# EAGLE board TestNode V1-pan (EAGLE 6.4)
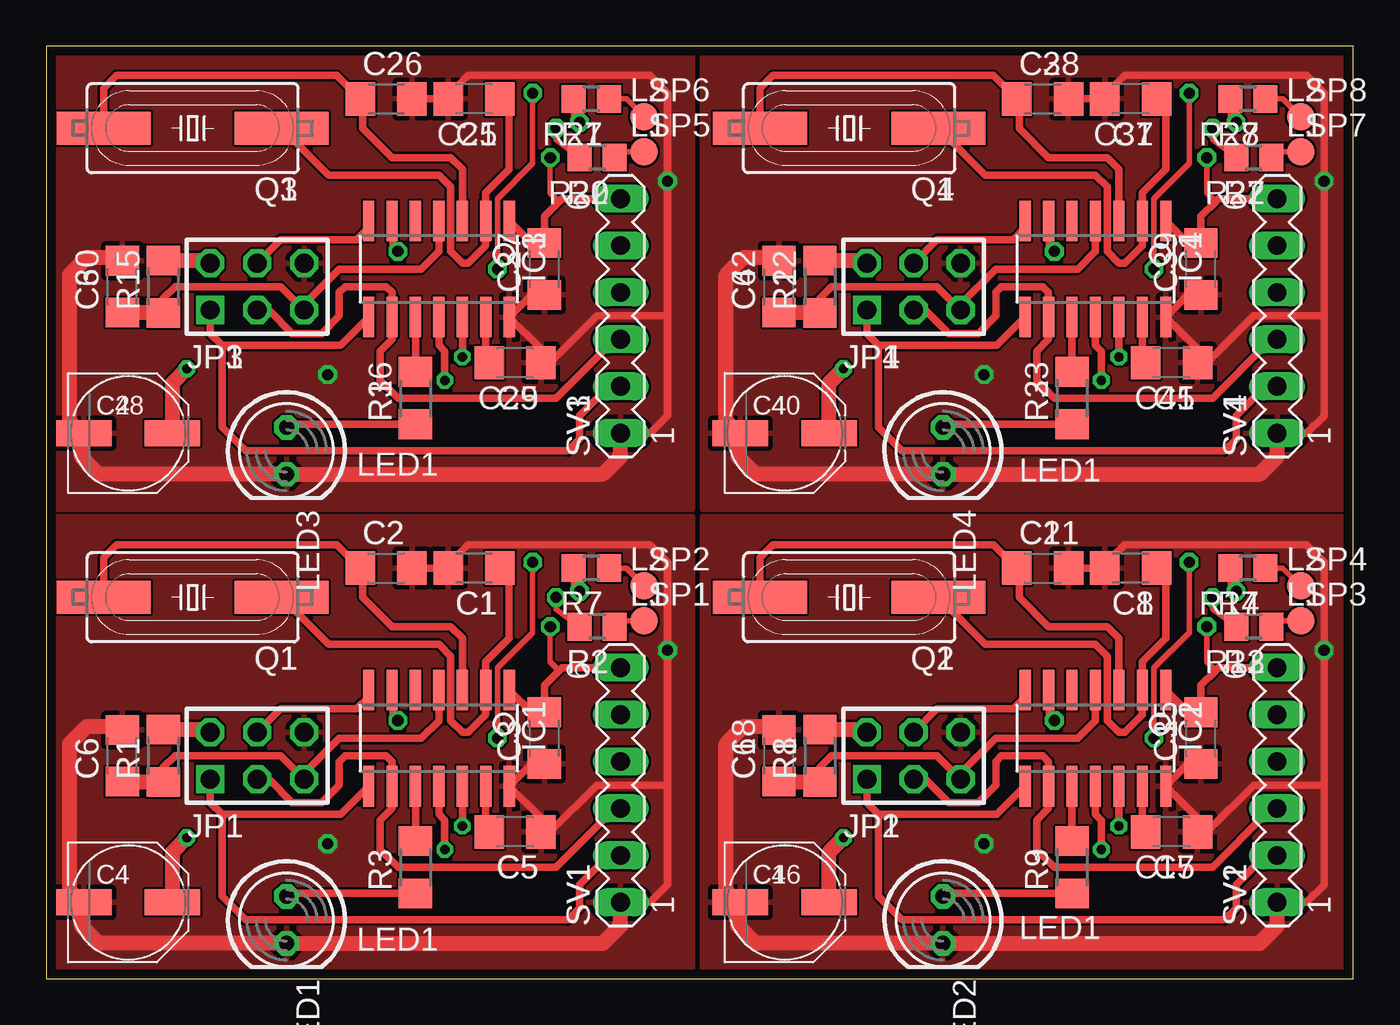
[diagram p0: board, top side]
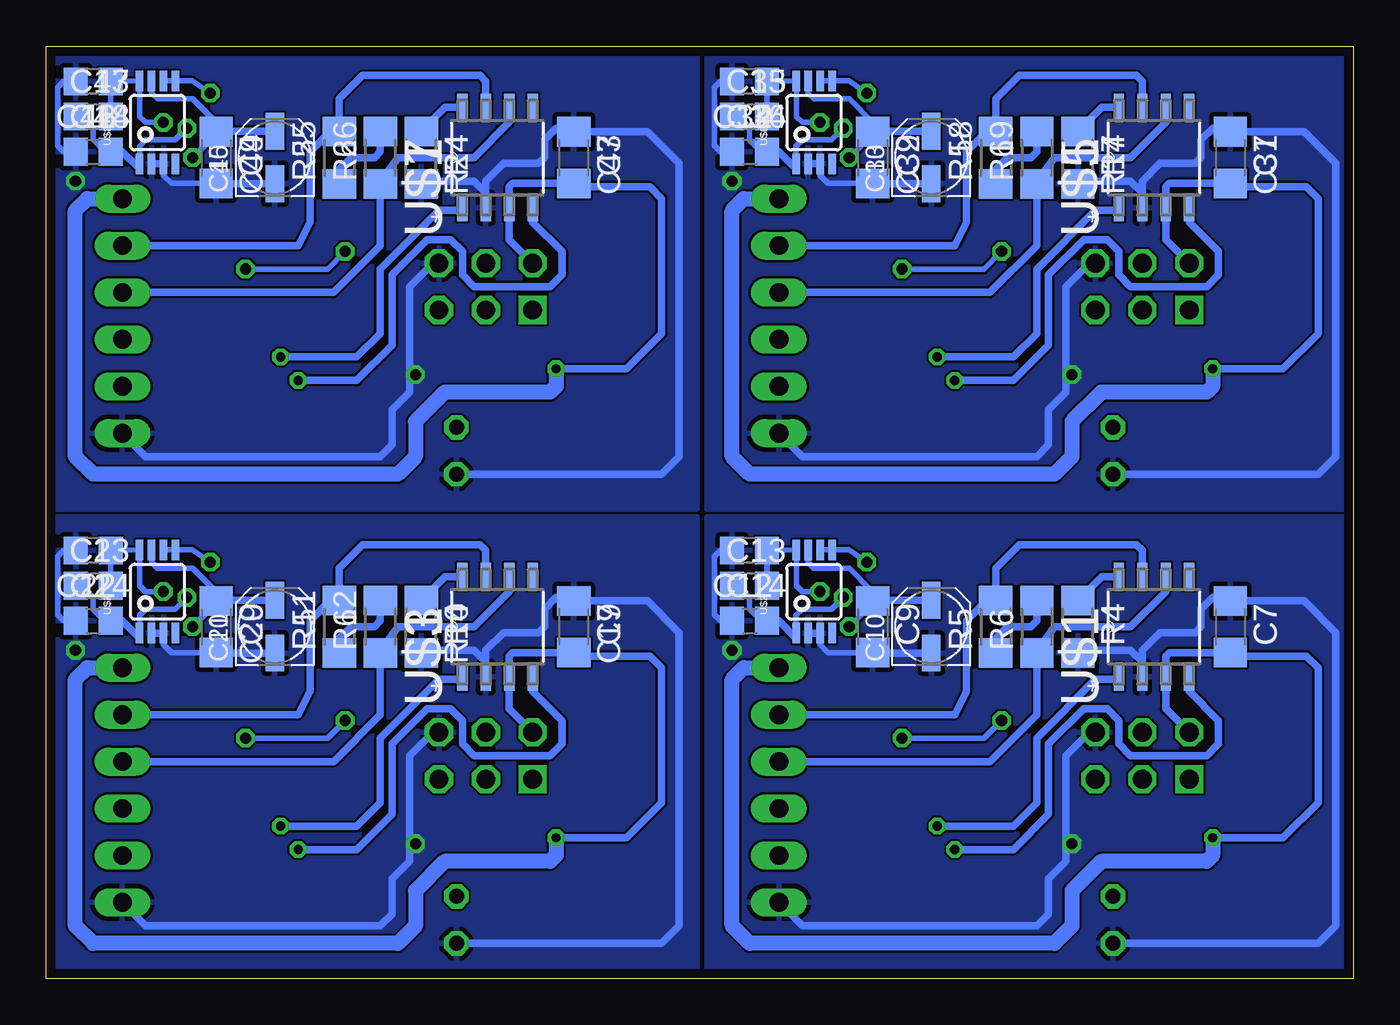
[diagram p1: board, bottom side, seen from below]

Size 70.8 x 50.48 mm. Coordinates in mm from the lower left corner, seen from the top.
Outline: 0,0 70.8,0 70.8,50.48 0,50.48 0,0
Copper layers (1*16): Top 0.035mm / dielectric 1.5mm / Bottom 0.035mm
Design rules "default *": minimum track width 10mil, minimum drill 15mil, track to track 5mil, track to pad 5mil, pad to pad 5mil, via to via 5mil, smd to smd 5mil, copper to edge 20mil, drill to drill 8mil, minimum pad ring 10mil, minimum via ring 8mil, stop-mask expansion 4mil, vias tented up to drill 0mil, thermal gap 10mil

## Footprints (pad centres in the part's own frame; a part is rotated, then mirrored left to right if it is on the bottom)
C1206 = smd 1.6 x 1.8: 1 -1.4,0; 2 1.4,0
PANASONIC_D = smd 3 x 1.4: + 2.4,0; - -2.4,0
UD-4X5,8_NICHICON = smd 2 x 1: + 1.425,0; - -1.425,0
C0805 = smd 1.3 x 1.5: 1 -0.95,0; 2 0.95,0
SOIC14 = smd 0.61 x 2.21: 1 -3.81,-2.603; 2 -2.54,-2.603; 3 -1.27,-2.603; 4 0,-2.603; 5 1.27,-2.603; 6 2.54,-2.603; 7 3.81,-2.603; 8 3.81,2.603; 9 2.54,2.603; 10 1.27,2.603; 11 0,2.603; 12 -1.27,2.603; 13 -2.54,2.603; 14 -3.81,2.603
AVR-ISP-6 = drill 1.016 square: 1 -2.54,-1.27 | drill 1.016 octagon: 2 -2.54,1.27; 3 0,-1.27; 4 0,1.27; 5 2.54,-1.27; 6 2.54,1.27
LED5MM = drill 0.813 octagon: A -1.27,0; K 1.27,0
TP15R = smd 1.5 x 1.5: TP 0,0
SM49 = smd 5.08 x 1.778: 1 -4.826,0; 2 4.826,0
R1206 = smd 1.6 x 1.803: 1 -1.422,0; 2 1.422,0
R0805 = smd 1.3 x 1.5: 1 -0.95,0; 2 0.95,0
MA06-1 = drill 1.016 long: 1 -6.35,0; 2 -3.81,0; 3 -1.27,0; 4 1.27,0; 5 3.81,0; 6 6.35,0
SOIC127P600X175-8N = smd 1.473 x 0.559: 1 -2.718,1.905; 2 -2.718,0.635; 3 -2.718,-0.635; 4 -2.718,-1.905; 5 2.718,-1.905; 6 2.718,-0.635; 7 2.718,0.635; 8 2.718,1.905
MSOP8 = smd 0.4 x 1.1: 1 -0.975,-2.25; 2 -0.325,-2.25; 3 0.325,-2.25; 4 0.975,-2.25; 5 0.975,2.25; 6 0.325,2.25; 7 -0.325,2.25; 8 -0.975,2.25

## Placement (x,y rotation side)
C1  22pF  [C1206]  23.18,22.23 180 top
C2  22pF  [C1206]  18.41,22.23 0 top
C3  100nF  [C1206]  26.99,13.02 90 top
C4  100uF  [PANASONIC_D]  4.45,4.13 0 top
C5  100nF  [C1206]  25.4,7.94 180 top
C6  22pF  [C1206]  4.13,12.06 90 top
C7  100nF  [C1206]  6.67,19.05 270 bottom
C8  22pF  [C1206]  58.74,22.23 180 top
C9  100nF  [C1206]  26.04,19.05 270 bottom
C10  10uF  [UD-4X5,8_NICHICON]  22.86,19.05 90 bottom
C11  22pF  [C1206]  53.98,22.23 0 top
C12  100nF  [C0805]  32.7,23.18 180 bottom
C13  100nF  [C0805]  32.7,21.27 0 bottom
C14  100nF  [C0805]  32.7,19.37 0 bottom
C15  100nF  [C1206]  62.55,13.02 90 top
C16  100uF  [PANASONIC_D]  40.01,4.13 0 top
C17  100nF  [C1206]  60.96,7.94 180 top
C18  22pF  [C1206]  39.69,12.06 90 top
C19  100nF  [C1206]  42.23,19.05 270 bottom
C20  100nF  [C1206]  61.59,19.05 270 bottom
C21  10uF  [UD-4X5,8_NICHICON]  58.42,19.05 90 bottom
C22  100nF  [C0805]  68.26,23.18 180 bottom
C23  100nF  [C0805]  68.26,21.27 0 bottom
C24  100nF  [C0805]  68.26,19.37 0 bottom
C25  22pF  [C1206]  23.18,47.62 180 top
C26  22pF  [C1206]  18.41,47.62 0 top
C27  100nF  [C1206]  26.99,38.42 90 top
C28  100uF  [PANASONIC_D]  4.45,29.53 0 top
C29  100nF  [C1206]  25.4,33.34 180 top
C30  22pF  [C1206]  4.13,37.47 90 top
C31  100nF  [C1206]  6.67,44.45 270 bottom
C32  100nF  [C1206]  26.04,44.45 270 bottom
C33  10uF  [UD-4X5,8_NICHICON]  22.86,44.45 90 bottom
C34  100nF  [C0805]  32.7,48.58 180 bottom
C35  100nF  [C0805]  32.7,46.67 0 bottom
C36  100nF  [C0805]  32.7,44.77 0 bottom
C37  22pF  [C1206]  58.74,47.62 180 top
C38  22pF  [C1206]  53.98,47.62 0 top
C39  100nF  [C1206]  62.55,38.42 90 top
C40  100uF  [PANASONIC_D]  40.01,29.53 0 top
C41  100nF  [C1206]  60.96,33.34 180 top
C42  22pF  [C1206]  39.69,37.47 90 top
C43  100nF  [C1206]  42.23,44.45 270 bottom
C44  100nF  [C1206]  61.59,44.45 270 bottom
C45  10uF  [UD-4X5,8_NICHICON]  58.42,44.45 90 bottom
C46  100nF  [C0805]  68.26,48.58 180 bottom
C47  100nF  [C0805]  68.26,46.67 0 bottom
C48  100nF  [C0805]  68.26,44.77 0 bottom
IC1  TINY24/44/84-SSU  [SOIC14]  21.27,13.02 180 top
IC2  TINY24/44/84-SSU  [SOIC14]  56.83,13.02 180 top
IC3  TINY24/44/84-SSU  [SOIC14]  21.27,38.42 180 top
IC4  TINY24/44/84-SSU  [SOIC14]  56.83,38.42 180 top
JP1  AVR-ISP-6VERT  [AVR-ISP-6]  11.43,12.06 0 top
JP2  AVR-ISP-6VERT  [AVR-ISP-6]  46.99,12.06 0 top
JP3  AVR-ISP-6VERT  [AVR-ISP-6]  11.43,37.47 0 top
JP4  AVR-ISP-6VERT  [AVR-ISP-6]  46.99,37.47 0 top
LED1  [LED5MM]  13.02,3.17 270 top
LED2  [LED5MM]  48.58,3.17 270 top
LED3  [LED5MM]  13.02,28.57 270 top
LED4  [LED5MM]  48.58,28.57 270 top
LSP1  TPTP15R  [TP15R]  32.38,19.37 0 top
LSP2  TPTP15R  [TP15R]  32.38,21.27 0 top
LSP3  TPTP15R  [TP15R]  67.94,19.37 0 top
LSP4  TPTP15R  [TP15R]  67.94,21.27 0 top
LSP5  TPTP15R  [TP15R]  32.38,44.77 0 top
LSP6  TPTP15R  [TP15R]  32.38,46.67 0 top
LSP7  TPTP15R  [TP15R]  67.94,44.77 0 top
LSP8  TPTP15R  [TP15R]  67.94,46.67 0 top
Q1  16Mhz  [SM49]  7.94,20.64 180 top
Q2  16Mhz  [SM49]  43.5,20.64 180 top
Q3  16Mhz  [SM49]  7.94,46.04 180 top
Q4  16Mhz  [SM49]  43.5,46.04 180 top
R1  10k  [R1206]  6.35,12.06 90 top
R2  1k  [R0805]  29.84,19.05 180 top
R3  470  [R1206]  20,6.03 90 top
R4  10k  [R1206]  14.92,19.05 270 bottom
R5  120  [R1206]  19.37,19.05 90 bottom
R6  0  [R1206]  17.14,19.05 90 bottom
R7  1k  [R0805]  29.53,22.23 180 top
R8  10k  [R1206]  41.91,12.06 90 top
R9  470  [R1206]  55.56,6.03 90 top
R10  10k  [R1206]  50.48,19.05 270 bottom
R11  120  [R1206]  54.93,19.05 90 bottom
R12  0  [R1206]  52.7,19.05 90 bottom
R13  1k  [R0805]  65.41,19.05 180 top
R14  1k  [R0805]  65.09,22.23 180 top
R15  10k  [R1206]  6.35,37.47 90 top
R16  470  [R1206]  20,31.43 90 top
R17  10k  [R1206]  14.92,44.45 270 bottom
R18  120  [R1206]  19.37,44.45 90 bottom
R19  0  [R1206]  17.14,44.45 90 bottom
R20  1k  [R0805]  29.84,44.45 180 top
R21  1k  [R0805]  29.53,47.62 180 top
R22  10k  [R1206]  41.91,37.47 90 top
R23  470  [R1206]  55.56,31.43 90 top
R24  10k  [R1206]  50.48,44.45 270 bottom
R25  120  [R1206]  54.93,44.45 90 bottom
R26  0  [R1206]  52.7,44.45 90 bottom
R27  1k  [R0805]  65.41,44.45 180 top
R28  1k  [R0805]  65.09,47.62 180 top
SV1  [MA06-1]  31.11,10.48 90 top
SV2  [MA06-1]  66.67,10.48 90 top
SV3  [MA06-1]  31.11,35.88 90 top
SV4  [MA06-1]  66.67,35.88 90 top
U$1  MCP2551-I/SN  [SOIC127P600X175-8N]  10.79,19.05 90 bottom
U$2  AD849X  [MSOP8]  29.21,20.95 0 bottom
U$3  MCP2551-I/SN  [SOIC127P600X175-8N]  46.35,19.05 90 bottom
U$4  AD849X  [MSOP8]  64.77,20.95 0 bottom
U$5  MCP2551-I/SN  [SOIC127P600X175-8N]  10.79,44.45 90 bottom
U$6  AD849X  [MSOP8]  29.21,46.35 0 bottom
U$7  MCP2551-I/SN  [SOIC127P600X175-8N]  46.35,44.45 90 bottom
U$8  AD849X  [MSOP8]  64.77,46.35 0 bottom

## Library data of the parts
C1-C3 C5-C15 C17-C27 C29-C39 C41-C48 R1-R28 = rcl
C4 C16 C28 C40 = rcl; FARNELL: 107SML016M
IC1-IC4 JP1-JP4 = avr-7
LED1-LED4 = led
LSP1-LSP8 = testpad
Q1-Q4 = crystal; OC_FARNELL: unknown; OC_NEWARK: unknown
SV1-SV4 = con-lstb; OC_FARNELL: unknown; OC_NEWARK: unknown
U$1 U$3 U$5 U$7 = mcp; MPN: MCP2551-I/SN; OC_FARNELL: 9758569; OC_NEWARK: 69K7604; PACKAGE: SOIC-8; SUPPLIER: Microchip
U$2 U$4 U$6 U$8 = ad849x

## Nets
ADC1: IC2.10 R9.2
ADC2: IC2.6 U$4.5 U$4.6
ADC3: IC1.10 R3.2
ADC4: IC3.10 R16.2
ADC5: IC3.6 U$6.5 U$6.6
ADC6: IC4.10 R23.2
ADC7: IC1.6 U$2.5 U$2.6
ADC8: IC4.6 U$8.5 U$8.6
GND: C1.2 C2.2 C3.1 C4.- C5.1 C6.2 C7.1 C9.2 C10.- C12.2 C14.1 IC1.14 JP1.6 LED1.K R4.2 SV1.1 U$1.2 U$2.2 U$2.3
GND1: C8.2 C11.2 C15.1 C16.- C17.1 C18.2 C19.1 C20.2 C21.- C22.2 C24.1 IC2.14 JP2.6 LED2.K R10.2 SV2.1 U$3.2 U$4.2 U$4.3
GND2: C25.2 C26.2 C27.1 C28.- C29.1 C30.2 C31.1 C32.2 C33.- C34.2 C36.1 IC3.14 JP3.6 LED3.K R17.2 SV3.1 U$5.2 U$6.2 U$6.3
GND3: C37.2 C38.2 C39.1 C40.- C41.1 C42.2 C43.1 C44.2 C45.- C46.2 C48.1 IC4.14 JP4.6 LED4.K R24.2 SV4.1 U$7.2 U$8.2 U$8.3
MISO: IC1.8 JP1.1 SV1.2
MISO1: IC2.8 JP2.1 SV2.2
MISO2: IC3.8 JP3.1 SV3.2
MISO3: IC4.8 JP4.1 SV4.2
MOSI: IC1.7 JP1.4
MOSI1: IC2.7 JP2.4
MOSI2: IC3.7 JP3.4
MOSI3: IC4.7 JP4.4
N$1: C1.1 IC1.2 Q1.1
N$2: C2.1 IC1.3 Q1.2
N$3: C12.1 C13.2 R7.2 U$2.8
N$4: C5.2 IC1.13
N$5: R4.1 U$1.8
N$6: LED1.A R3.1
N$7: R5.1 R6.2
N$8: C13.1 C14.2 R2.2 U$2.1
N$9: C8.1 IC2.2 Q2.1
N$10: LSP1.TP R2.1
N$11: LSP2.TP R7.1
N$12: C11.1 IC2.3 Q2.2
N$13: C17.2 IC2.13
N$14: LED2.A R9.1
N$15: R10.1 U$3.8
N$16: R11.1 R12.2
N$17: C22.1 C23.2 R14.2 U$4.8
N$18: C23.1 C24.2 R13.2 U$4.1
N$19: LSP3.TP R13.1
N$20: LSP4.TP R14.1
N$21: C25.1 IC3.2 Q3.1
N$22: C26.1 IC3.3 Q3.2
N$23: C29.2 IC3.13
N$24: LED3.A R16.1
N$25: R17.1 U$5.8
N$26: R18.1 R19.2
N$27: C34.1 C35.2 R21.2 U$6.8
N$28: C35.1 C36.2 R20.2 U$6.1
N$29: LSP5.TP R20.1
N$30: LSP6.TP R21.1
N$31: C37.1 IC4.2 Q4.1
N$32: C38.1 IC4.3 Q4.2
N$33: C41.2 IC4.13
N$34: LED4.A R23.1
N$35: R24.1 U$7.8
N$36: R25.1 R26.2
N$37: C46.1 C47.2 R28.2 U$8.8
N$38: C47.1 C48.2 R27.2 U$8.1
N$39: LSP7.TP R27.1
N$40: LSP8.TP R28.1
RST: C6.1 IC1.4 JP1.5 R1.1
RST1: C18.1 IC2.4 JP2.5 R8.1
RST2: C30.1 IC3.4 JP3.5 R15.1
RST3: C42.1 IC4.4 JP4.5 R22.1
RX0: IC1.11 U$1.4
RX1: IC2.11 U$3.4
RX2: IC3.11 U$5.4
RX3: IC4.11 U$7.4
SCK: IC1.9 JP1.3 SV1.3
SCK1: IC2.9 JP2.3 SV2.3
SCK2: IC3.9 JP3.3 SV3.3
SCK3: IC4.9 JP4.3 SV4.3
TX0: IC1.12 U$1.1
TX1: IC2.12 U$3.1
TX2: IC3.12 U$5.1
TX3: IC4.12 U$7.1
UART0+: R5.2 SV1.5 U$1.7
UART0+1: R11.2 SV2.5 U$3.7
UART0+2: R18.2 SV3.5 U$5.7
UART0+3: R25.2 SV4.5 U$7.7
UART0-: R6.1 SV1.4 U$1.6
UART0-1: R12.1 SV2.4 U$3.6
UART0-2: R19.1 SV3.4 U$5.6
UART0-3: R26.1 SV4.4 U$7.6
VCC: C3.2 C4.+ C7.2 C9.1 C10.+ IC1.1 JP1.2 R1.2 SV1.6 U$1.3 U$2.7
VCC1: C15.2 C16.+ C19.2 C20.1 C21.+ IC2.1 JP2.2 R8.2 SV2.6 U$3.3 U$4.7
VCC2: C27.2 C28.+ C31.2 C32.1 C33.+ IC3.1 JP3.2 R15.2 SV3.6 U$5.3 U$6.7
VCC3: C39.2 C40.+ C43.2 C44.1 C45.+ IC4.1 JP4.2 R22.2 SV4.6 U$7.3 U$8.7

## Tracks (layer width: path | path; a pad name or v marks a point on that pad's centre or on a via)
ADC1
  Top 0.406: IC2.10 R9.2
ADC2  (via drill 0.6)
  Top 0.305: v61.91,22.54 61.91,18.73 60.01,16.83 v60.01,13.02 | v54.61,13.97 54.29,14.29 IC2.6
  Bottom 0.305: U$4.6 U$4.5 62.89,23.2 v61.91,22.54 | v60.01,13.02 55.56,13.02 v54.61,13.97
ADC3
  Top 0.406: IC1.10 R3.2
ADC4
  Top 0.406: IC3.10 R16.2
ADC5  (via drill 0.6)
  Top 0.305: v26.35,47.94 26.35,44.13 24.45,42.23 v24.45,38.42 | v19.05,39.37 18.73,39.69 IC3.6
  Bottom 0.305: U$6.6 U$6.5 27.33,48.6 v26.35,47.94 | v24.45,38.42 20,38.42 v19.05,39.37
ADC6
  Top 0.406: IC4.10 R23.2
ADC7  (via drill 0.6)
  Top 0.305: v26.35,22.54 26.35,18.73 24.45,16.83 v24.45,13.02 | v19.05,13.97 18.73,14.29 IC1.6
  Bottom 0.305: U$2.6 U$2.5 27.33,23.2 v26.35,22.54 | v24.45,13.02 20,13.02 v19.05,13.97
ADC8  (via drill 0.6)
  Top 0.305: v61.91,47.94 61.91,44.13 60.01,42.23 v60.01,38.42 | v54.61,39.37 54.29,39.69 IC4.6
  Bottom 0.305: U$8.6 U$8.5 62.89,48.6 v61.91,47.94 | v60.01,38.42 55.56,38.42 v54.61,39.37
GND  (via drill 0.6 pad 1.02)
  Top 0.406: C3.1 26.29,11.62 IC1.14 26.8,8.7 C5.1 27.3,7.94 29.84,10.48 33.66,10.48 | SV1.1 32.7,4.13 33.66,5.08 33.66,10.48 | C1.2 C2.2 22.23,22.23 22.23,22.86 22.86,23.5 32.7,23.5 33.66,22.54 v33.66,17.78 33.66,10.48
  Top 0.813: SV1.1 31.11,2.86 30.16,1.91 LED1.K 2.86,1.91 1.91,2.86 1.91,3.99 C4.- 1.91,4.13 1.27,4.76 1.27,12.7 2.22,13.65 3.94,13.65 C6.2
  Bottom 0.305: C9.2 28.45,17.65 28.89,18.1 U$2.3 | C14.1 34.29,19.37 34.61,19.68 34.61,22.86 34.29,23.18 C12.2
  Bottom 0.406: JP1.6 14.29,13.34 15.56,12.06 15.56,6.35 16.51,5.4 16.51,3.49 17.14,2.86 29.84,2.86 SV1.1 | LED1.K 1.91,1.91 0.95,2.86 0.95,18.73 2.67,20.45 C7.1 6.86,20.64 7.62,20.64 8.26,20 8.26,19.05 8.57,18.73 10.48,18.73 11.43,17.78 U$1.2 11.43,17.14 12.06,17.78 14.77,17.78 R4.2 | C10.- 26.04,17.62 C9.2 | U$2.3 U$2.2
  other vias: 15.24,7.3
  pour Bottom: 0,25 35,25 35,0 0,0
  pour Top: 0,25 35,25 35,0 0,0
GND1  (via drill 0.6 pad 1.02)
  Top 0.406: C15.1 61.85,11.62 IC2.14 62.36,8.7 C17.1 62.87,7.94 65.41,10.48 69.22,10.48 | SV2.1 68.26,4.13 69.22,5.08 69.22,10.48 | C8.2 C11.2 57.78,22.23 57.78,22.86 58.42,23.5 68.26,23.5 69.22,22.54 v69.22,17.78 69.22,10.48
  Top 0.813: SV2.1 66.67,2.86 65.72,1.91 LED2.K 38.42,1.91 37.47,2.86 37.47,3.99 C16.- 37.47,4.13 36.83,4.76 36.83,12.7 37.78,13.65 39.5,13.65 C18.2
  Bottom 0.305: C20.2 64,17.65 64.45,18.1 64.45,18.7 U$4.3 | C24.1 69.85,19.37 70.17,19.68 70.17,22.86 69.85,23.18 C22.2
  Bottom 0.406: JP2.6 49.85,13.34 51.12,12.06 51.12,6.35 52.07,5.4 52.07,3.49 52.7,2.86 65.41,2.86 SV2.1 | LED2.K 37.47,1.91 36.51,2.86 36.51,18.73 38.23,20.45 C19.1 42.41,20.64 43.18,20.64 43.81,20 43.81,19.05 44.13,18.73 46.04,18.73 46.99,17.78 U$3.2 46.99,17.14 47.62,17.78 50.33,17.78 R10.2 | C21.- 61.59,17.62 C20.2 | U$4.3 U$4.2
  other vias: 50.8,7.3
  pour Bottom: 35.56,25 70.56,25 70.56,0 35.56,0
  pour Top: 35.56,25 70.56,25 70.56,0 35.56,0
GND2  (via drill 0.6 pad 1.02)
  Top 0.406: C27.1 26.29,37.02 IC3.14 26.8,34.1 C29.1 27.3,33.34 29.84,35.88 33.66,35.88 | SV3.1 32.7,29.53 33.66,30.48 33.66,35.88 | C25.2 C26.2 22.23,47.62 22.23,48.26 22.86,48.9 32.7,48.9 33.66,47.94 v33.66,43.18 33.66,35.88
  Top 0.813: SV3.1 31.11,28.26 30.16,27.3 LED3.K 2.86,27.3 1.91,28.26 1.91,29.39 C28.- 1.91,29.53 1.27,30.16 1.27,38.1 2.22,39.05 3.94,39.05 C30.2
  Bottom 0.305: C32.2 28.45,43.05 28.89,43.5 U$6.3 | C36.1 34.29,44.77 34.61,45.09 34.61,48.26 34.29,48.58 C34.2
  Bottom 0.406: JP3.6 14.29,38.73 15.56,37.47 15.56,31.75 16.51,30.8 16.51,28.89 17.14,28.26 29.84,28.26 SV3.1 | LED3.K 1.91,27.3 0.95,28.26 0.95,44.13 2.67,45.85 C31.1 6.86,46.04 7.62,46.04 8.26,45.4 8.26,44.45 8.57,44.13 10.48,44.13 11.43,43.18 U$5.2 11.43,42.55 12.06,43.18 14.77,43.18 R17.2 | C33.- 26.04,43.02 C32.2 | U$6.3 U$6.2
  other vias: 15.24,32.7
  pour Bottom: 0,50.4 35,50.4 35,25.4 0,25.4
  pour Top: 0,50.4 35,50.4 35,25.4 0,25.4
GND3  (via drill 0.6 pad 1.02)
  Top 0.406: C39.1 61.85,37.02 IC4.14 62.36,34.1 C41.1 62.87,33.34 65.41,35.88 69.22,35.88 | SV4.1 68.26,29.53 69.22,30.48 69.22,35.88 | C37.2 C38.2 57.78,47.62 57.78,48.26 58.42,48.9 68.26,48.9 69.22,47.94 v69.22,43.18 69.22,35.88
  Top 0.813: SV4.1 66.67,28.26 65.72,27.3 LED4.K 38.42,27.3 37.47,28.26 37.47,29.39 C40.- 37.47,29.53 36.83,30.16 36.83,38.1 37.78,39.05 39.5,39.05 C42.2
  Bottom 0.305: C44.2 64,43.05 64.45,43.5 64.45,44.1 U$8.3 | C48.1 69.85,44.77 70.17,45.09 70.17,48.26 69.85,48.58 C46.2
  Bottom 0.406: JP4.6 49.85,38.73 51.12,37.47 51.12,31.75 52.07,30.8 52.07,28.89 52.7,28.26 65.41,28.26 SV4.1 | LED4.K 37.47,27.3 36.51,28.26 36.51,44.13 38.23,45.85 C43.1 42.41,46.04 43.18,46.04 43.81,45.4 43.81,44.45 44.13,44.13 46.04,44.13 46.99,43.18 U$7.2 46.99,42.55 47.62,43.18 50.33,43.18 R24.2 | C45.- 61.59,43.02 C44.2 | U$8.3 U$8.2
  other vias: 50.8,32.7
  pour Bottom: 35.56,50.4 70.56,50.4 70.56,25.4 35.56,25.4
  pour Top: 35.56,50.4 70.56,50.4 70.56,25.4 35.56,25.4
MISO
  Top 0.406: JP1.1 8.89,9.53 9.53,8.89 | IC1.8 15.94,8.89 9.53,8.89 | SV1.2 30.48,6.67 28.89,5.08 28.89,3.81 28.26,3.17 10.79,3.17 9.53,4.45 9.53,8.89
MISO1
  Top 0.406: JP2.1 44.45,9.53 45.09,8.89 | IC2.8 51.5,8.89 45.09,8.89 | SV2.2 66.04,6.67 64.45,5.08 64.45,3.81 63.82,3.17 46.35,3.17 45.09,4.45 45.09,8.89
MISO2
  Top 0.406: JP3.1 8.89,34.92 9.53,34.29 | IC3.8 15.94,34.29 9.53,34.29 | SV3.2 30.48,32.07 28.89,30.48 28.89,29.21 28.26,28.57 10.79,28.57 9.53,29.84 9.53,34.29
MISO3
  Top 0.406: JP4.1 44.45,34.92 45.09,34.29 | IC4.8 51.5,34.29 45.09,34.29 | SV4.2 66.04,32.07 64.45,30.48 64.45,29.21 63.82,28.57 46.35,28.57 45.09,29.84 45.09,34.29
MOSI
  Top 0.406: IC1.7 17.46,15.24 16.83,14.61 12.7,14.61 JP1.4
MOSI1
  Top 0.406: IC2.7 53.02,15.24 52.39,14.61 48.26,14.61 JP2.4
MOSI2
  Top 0.406: IC3.7 17.46,40.64 16.83,40.01 12.7,40.01 JP3.4
MOSI3
  Top 0.406: IC4.7 53.02,40.64 52.39,40.01 48.26,40.01 JP4.4
N$1
  Top 0.406: C1.1 25.08,22.04 25.08,18.41 23.81,17.14 IC1.2 23.81,14.29 22.86,13.34 22.54,13.34 21.91,13.97 21.91,17.46 21.27,18.1 15.3,18.1 Q1.1
N$2
  Top 0.406: Q1.2 3.11,22.8 3.81,23.5 15.74,23.5 C2.1 17.14,22.09 17.14,20.64 18.73,19.05 21.91,19.05 22.54,18.41 IC1.3
N$3  (via drill 0.6)
  Top 0.305: R7.2 28.58,21.27 v28.89,20.95
  Bottom 0.305: C13.2 C12.1 30.85,23.18 U$2.8 30.16,23.18 30.16,21.27 29.84,20.95 v28.89,20.95
N$4
  Top 0.406: IC1.13 23.81,8.12 C5.2
N$5
  Bottom 0.406: U$1.8 13.63,21.77 R4.1
N$6
  Top 0.406: R3.1 13.18,4.61 LED1.A
N$7
  Bottom 0.406: R5.1 19.37,18.41 18.73,19.05 17.46,19.05 17.14,19.37 R6.2
N$8  (via drill 0.6)
  Top 0.305: v27.62,20.64 27.62,20 R2.2
  Bottom 0.305: C14.2 32.07,19.37 32.7,20 32.7,20.64 33.02,20.95 C13.1 | U$2.1 30.18,19.66 29.84,20 28.26,20 v27.62,20.64
  Bottom 0.406: U$2.1 30.18,18.44 31.11,19.37 C14.2
N$9
  Top 0.406: C8.1 60.64,22.04 60.64,18.41 59.37,17.14 IC2.2 59.37,14.29 58.42,13.34 58.1,13.34 57.47,13.97 57.47,17.46 56.83,18.1 50.86,18.1 Q2.1
N$10
  Top 0.305: R2.1 30.48,19.05 30.8,19.37 LSP1.TP
N$11
  Top 0.305: R7.1 31.43,22.23 LSP2.TP
N$12
  Top 0.406: Q2.2 38.67,22.8 39.37,23.5 51.3,23.5 C11.1 52.7,22.09 52.7,20.64 54.29,19.05 57.47,19.05 58.1,18.41 IC2.3
N$13
  Top 0.406: IC2.13 59.37,8.12 C17.2
N$14
  Top 0.406: R9.1 48.74,4.61 LED2.A
N$15
  Bottom 0.406: U$3.8 49.19,21.77 R10.1
N$16
  Bottom 0.406: R11.1 54.93,18.41 54.29,19.05 53.02,19.05 52.7,19.37 R12.2
N$17  (via drill 0.6)
  Top 0.305: R14.2 64.14,21.27 v64.45,20.95
  Bottom 0.305: C23.2 C22.1 66.41,23.18 U$4.8 65.72,23.18 65.72,21.27 65.41,20.95 v64.45,20.95
N$18  (via drill 0.6)
  Top 0.305: v63.18,20.64 63.18,20 R13.2
  Bottom 0.305: C24.2 67.63,19.37 68.26,20 68.26,20.64 68.58,20.95 C23.1 | U$4.1 65.75,19.66 65.41,20 63.82,20 v63.18,20.64
  Bottom 0.406: U$4.1 65.75,18.44 66.67,19.37 C24.2
N$19
  Top 0.305: R13.1 66.04,19.05 66.36,19.37 LSP3.TP
N$20
  Top 0.305: R14.1 66.99,22.23 LSP4.TP
N$21
  Top 0.406: C25.1 25.08,47.44 25.08,43.81 23.81,42.55 IC3.2 23.81,39.69 22.86,38.73 22.54,38.73 21.91,39.37 21.91,42.86 21.27,43.5 15.3,43.5 Q3.1
N$22
  Top 0.406: Q3.2 3.11,48.2 3.81,48.9 15.74,48.9 C26.1 17.14,47.49 17.14,46.04 18.73,44.45 21.91,44.45 22.54,43.81 IC3.3
N$23
  Top 0.406: IC3.13 23.81,33.52 C29.2
N$24
  Top 0.406: R16.1 13.18,30.01 LED3.A
N$25
  Bottom 0.406: U$5.8 13.63,47.17 R17.1
N$26
  Bottom 0.406: R18.1 19.37,43.81 18.73,44.45 17.46,44.45 17.14,44.77 R19.2
N$27  (via drill 0.6)
  Top 0.305: R21.2 28.58,46.67 v28.89,46.35
  Bottom 0.305: C35.2 C34.1 30.85,48.58 U$6.8 30.16,48.58 30.16,46.67 29.84,46.35 v28.89,46.35
N$28  (via drill 0.6)
  Top 0.305: v27.62,46.04 27.62,45.41 R20.2
  Bottom 0.305: C36.2 32.07,44.77 32.7,45.4 32.7,46.04 33.02,46.35 C35.1 | U$6.1 30.18,45.06 29.84,45.4 28.26,45.4 v27.62,46.04
  Bottom 0.406: U$6.1 30.18,43.84 31.11,44.77 C36.2
N$29
  Top 0.305: R20.1 30.48,44.45 30.8,44.77 LSP5.TP
N$30
  Top 0.305: R21.1 31.43,47.62 LSP6.TP
N$31
  Top 0.406: C37.1 60.64,47.44 60.64,43.81 59.37,42.55 IC4.2 59.37,39.69 58.42,38.73 58.1,38.73 57.47,39.37 57.47,42.86 56.83,43.5 50.86,43.5 Q4.1
N$32
  Top 0.406: Q4.2 38.67,48.2 39.37,48.9 51.3,48.9 C38.1 52.7,47.49 52.7,46.04 54.29,44.45 57.47,44.45 58.1,43.81 IC4.3
N$33
  Top 0.406: IC4.13 59.37,33.52 C41.2
N$34
  Top 0.406: R23.1 48.74,30.01 LED4.A
N$35
  Bottom 0.406: U$7.8 49.19,47.17 R24.1
N$36
  Bottom 0.406: R25.1 54.93,43.81 54.29,44.45 53.02,44.45 52.7,44.77 R26.2
N$37  (via drill 0.6)
  Top 0.305: R28.2 64.14,46.67 v64.45,46.35
  Bottom 0.305: C47.2 C46.1 66.41,48.58 U$8.8 65.72,48.58 65.72,46.67 65.41,46.35 v64.45,46.35
N$38  (via drill 0.6)
  Top 0.305: v63.18,46.04 63.18,45.41 R27.2
  Bottom 0.305: C48.2 67.63,44.77 68.26,45.4 68.26,46.04 68.58,46.35 C47.1 | U$8.1 65.75,45.06 65.41,45.4 63.82,45.4 v63.18,46.04
  Bottom 0.406: U$8.1 65.75,43.84 66.67,44.77 C48.2
N$39
  Top 0.305: R27.1 66.04,44.45 66.36,44.77 LSP7.TP
N$40
  Top 0.305: R28.1 66.99,47.62 LSP8.TP
RST
  Top 0.406: R1.1 6.35,11.43 6.99,12.06 12.7,12.06 JP1.5 13.97,11.11 15.88,13.02 20.32,13.02 21.27,13.97 IC1.4
  Top 0.813: C6.1 6.33,10.66 R1.1
RST1
  Top 0.406: R8.1 41.91,11.43 42.55,12.06 48.26,12.06 JP2.5 49.53,11.11 51.44,13.02 55.88,13.02 56.83,13.97 IC2.4
  Top 0.813: C18.1 41.89,10.66 R8.1
RST2
  Top 0.406: R15.1 6.35,36.83 6.99,37.47 12.7,37.47 JP3.5 13.97,36.51 15.88,38.42 20.32,38.42 21.27,39.37 IC3.4
  Top 0.813: C30.1 6.33,36.06 R15.1
RST3
  Top 0.406: R22.1 41.91,36.83 42.55,37.47 48.26,37.47 JP4.5 49.53,36.51 51.44,38.42 55.88,38.42 56.83,39.37 IC4.4
  Top 0.813: C42.1 41.89,36.06 R22.1
RX0  (via drill 0.5 pad 0.61)
  Top 0.406: v21.59,6.99 21.59,8.57 21.27,8.89 IC1.11
  Bottom 0.406: U$1.4 8.89,15.56 7.3,13.97 7.3,12.7 7.94,12.06 12.06,12.06 12.7,12.7 12.7,13.97 13.34,14.61 14.61,14.61 16.51,12.7 16.51,8.89 18.41,6.99 v21.59,6.99
RX1  (via drill 0.5 pad 0.61)
  Top 0.406: v57.15,6.99 57.15,8.57 56.83,8.89 IC2.11
  Bottom 0.406: U$3.4 44.45,15.56 42.86,13.97 42.86,12.7 43.5,12.06 47.62,12.06 48.26,12.7 48.26,13.97 48.9,14.61 50.16,14.61 52.07,12.7 52.07,8.89 53.98,6.99 v57.15,6.99
RX2  (via drill 0.5 pad 0.61)
  Top 0.406: v21.59,32.38 21.59,33.97 21.27,34.29 IC3.11
  Bottom 0.406: U$5.4 8.89,40.96 7.3,39.37 7.3,38.1 7.94,37.47 12.06,37.47 12.7,38.1 12.7,39.37 13.34,40.01 14.61,40.01 16.51,38.1 16.51,34.29 18.41,32.38 v21.59,32.38
RX3  (via drill 0.5 pad 0.61)
  Top 0.406: v57.15,32.38 57.15,33.97 56.83,34.29 IC4.11
  Bottom 0.406: U$7.4 44.45,40.96 42.86,39.37 42.86,38.1 43.5,37.47 47.62,37.47 48.26,38.1 48.26,39.37 48.9,40.01 50.16,40.01 52.07,38.1 52.07,34.29 53.98,32.38 v57.15,32.38
SCK
  Top 0.406: JP1.3 12.06,10.79 13.34,9.53 14.92,9.53 15.88,10.48 15.88,11.75 16.19,12.06 18.41,12.06 18.73,11.75 IC1.9 18.73,9.21 18.1,8.57 18.1,6.99 19.05,6.03 27.62,6.03 30.48,8.89 30.48,9.21 SV1.3
SCK1
  Top 0.406: JP2.3 47.62,10.79 48.9,9.53 50.48,9.53 51.44,10.48 51.44,11.75 51.75,12.06 53.98,12.06 54.29,11.75 IC2.9 54.29,9.21 53.66,8.57 53.66,6.99 54.61,6.03 63.18,6.03 66.04,8.89 66.04,9.21 SV2.3
SCK2
  Top 0.406: JP3.3 12.06,36.2 13.34,34.92 14.92,34.92 15.88,35.88 15.88,37.15 16.19,37.47 18.41,37.47 18.73,37.15 IC3.9 18.73,34.61 18.1,33.97 18.1,32.38 19.05,31.43 27.62,31.43 30.48,34.29 30.48,34.61 SV3.3
SCK3
  Top 0.406: JP4.3 47.62,36.2 48.9,34.92 50.48,34.92 51.44,35.88 51.44,37.15 51.75,37.47 53.98,37.47 54.29,37.15 IC4.9 54.29,34.61 53.66,33.97 53.66,32.38 54.61,31.43 63.18,31.43 66.04,34.29 66.04,34.61 SV4.3
TX0  (via drill 0.5 pad 0.61)
  Top 0.406: IC1.12 v22.54,8.26
  Bottom 0.406: v22.54,8.26 18.41,8.26 17.14,9.53 17.14,13.02 13.97,16.19 12.84,16.19 U$1.1
TX1  (via drill 0.5 pad 0.61)
  Top 0.406: IC2.12 v58.1,8.26
  Bottom 0.406: v58.1,8.26 53.98,8.26 52.7,9.53 52.7,13.02 49.53,16.19 48.4,16.19 U$3.1
TX2  (via drill 0.5 pad 0.61)
  Top 0.406: IC3.12 v22.54,33.66
  Bottom 0.406: v22.54,33.66 18.41,33.66 17.14,34.92 17.14,38.42 13.97,41.59 12.84,41.59 U$5.1
TX3  (via drill 0.5 pad 0.61)
  Top 0.406: IC4.12 v58.1,33.66
  Bottom 0.406: v58.1,33.66 53.98,33.66 52.7,34.92 52.7,38.42 49.53,41.59 48.4,41.59 U$7.1
UART0+
  Bottom 0.406: U$1.7 11.43,23.18 11.75,23.5 18.1,23.5 19.37,22.23 R5.2 19.85,20.47 20.95,19.37 20.95,15.56 21.59,14.29 SV1.5
UART0+1
  Bottom 0.406: U$3.7 46.99,23.18 47.31,23.5 53.66,23.5 54.93,22.23 R11.2 55.41,20.47 56.52,19.37 56.52,15.56 57.15,14.29 SV2.5
UART0+2
  Bottom 0.406: U$5.7 11.43,48.58 11.75,48.9 18.1,48.9 19.37,47.62 R18.2 19.85,45.87 20.95,44.77 20.95,40.96 21.59,39.69 SV3.5
UART0+3
  Bottom 0.406: U$7.7 46.99,48.58 47.31,48.9 53.66,48.9 54.93,47.62 R25.2 55.41,45.87 56.52,44.77 56.52,40.96 57.15,39.69 SV4.5
UART0-
  Bottom 0.406: U$1.6 10.16,20.95 12.06,19.05 16.19,19.05 16.98,17.95 R6.1 17.14,14.29 19.68,11.75 SV1.4
UART0-1
  Bottom 0.406: U$3.6 45.72,20.95 47.62,19.05 51.75,19.05 52.54,17.95 R12.1 52.7,14.29 55.24,11.75 SV2.4
UART0-2
  Bottom 0.406: U$5.6 10.16,46.35 12.06,44.45 16.19,44.45 16.98,43.35 R19.1 17.14,39.69 19.68,37.15 SV3.4
UART0-3
  Bottom 0.406: U$7.6 45.72,46.35 47.62,44.45 51.75,44.45 52.54,43.35 R26.1 52.7,39.69 55.24,37.15 SV4.4
VCC  (via drill 0.5 pad 0.81, 0.6)
  Top 0.305: v27.3,19.05 27.3,17.14 27.78,16.67
  Top 0.406: IC1.1 26.29,14.42 C3.2 26.99,15.88 27.78,16.67 27.94,16.83 SV1.6
  Top 0.813: R1.2 8.74,13.49 JP1.2 | C4.+ 6.84,6.84 v7.62,7.62
  Bottom 0.305: U$2.7 29.53,23.2 29.53,22.54 29.21,22.23 27.3,22.23 26.04,20.95 C9.1 26.04,20.32 v27.3,19.05
  Bottom 0.406: JP1.2 10.16,14.61 U$1.3 10.16,17.46 9.97,17.65 C7.2 6.48,17.46 2.54,17.46 1.91,16.83 1.91,9.53 3.81,7.62 v7.62,7.62 | C10.+ 26.04,20.48 C9.1
  Bottom 0.813: v7.62,7.62 7.62,6.67 7.94,6.35 13.65,6.35 15.24,4.76 15.24,2.86 16.19,1.91 32.7,1.91 33.66,2.86 33.66,16.19 33.02,16.83 SV1.6
VCC1  (via drill 0.5 pad 0.81, 0.6)
  Top 0.305: v62.87,19.05 62.87,17.14 63.34,16.67
  Top 0.406: IC2.1 61.85,14.42 C15.2 62.55,15.88 63.34,16.67 63.5,16.83 SV2.6
  Top 0.813: R8.2 44.3,13.49 JP2.2 | C16.+ 42.41,6.84 v43.18,7.62
  Bottom 0.305: U$4.7 65.09,22.54 64.77,22.23 62.87,22.23 61.59,20.95 C20.1 61.59,20.32 v62.87,19.05
  Bottom 0.406: JP2.2 45.72,14.61 U$3.3 45.72,17.46 45.53,17.65 C19.2 42.04,17.46 38.1,17.46 37.47,16.83 37.47,9.53 39.37,7.62 v43.18,7.62 | C21.+ 61.59,20.48 C20.1
  Bottom 0.813: v43.18,7.62 43.18,6.67 43.5,6.35 49.21,6.35 50.8,4.76 50.8,2.86 51.75,1.91 68.26,1.91 69.22,2.86 69.22,16.19 68.58,16.83 SV2.6
VCC2  (via drill 0.5 pad 0.81, 0.6)
  Top 0.305: v27.3,44.45 27.3,42.55 27.78,42.07
  Top 0.406: IC3.1 26.29,39.82 C27.2 26.99,41.27 27.78,42.07 27.94,42.23 SV3.6
  Top 0.813: R15.2 8.74,38.89 JP3.2 | C28.+ 6.84,32.24 v7.62,33.02
  Bottom 0.305: U$6.7 29.53,48.6 29.53,47.94 29.21,47.62 27.3,47.62 26.04,46.35 C32.1 26.04,45.72 v27.3,44.45
  Bottom 0.406: JP3.2 10.16,40.01 U$5.3 10.16,42.86 9.97,43.05 C31.2 6.48,42.86 2.54,42.86 1.91,42.23 1.91,34.92 3.81,33.02 v7.62,33.02 | C33.+ 26.04,45.88 C32.1
  Bottom 0.813: v7.62,33.02 7.62,32.07 7.94,31.75 13.65,31.75 15.24,30.16 15.24,28.26 16.19,27.3 32.7,27.3 33.66,28.26 33.66,41.59 33.02,42.23 SV3.6
VCC3  (via drill 0.5 pad 0.81, 0.6)
  Top 0.305: v62.87,44.45 62.87,42.55 63.34,42.07
  Top 0.406: IC4.1 61.85,39.82 C39.2 62.55,41.27 63.34,42.07 63.5,42.23 SV4.6
  Top 0.813: R22.2 44.3,38.89 JP4.2 | C40.+ 42.41,32.24 v43.18,33.02
  Bottom 0.305: U$8.7 65.09,47.94 64.77,47.62 62.87,47.62 61.59,46.35 C44.1 61.59,45.72 v62.87,44.45
  Bottom 0.406: JP4.2 45.72,40.01 U$7.3 45.72,42.86 45.53,43.05 C43.2 42.04,42.86 38.1,42.86 37.47,42.23 37.47,34.92 39.37,33.02 v43.18,33.02 | C45.+ 61.59,45.88 C44.1
  Bottom 0.813: v43.18,33.02 43.18,32.07 43.5,31.75 49.21,31.75 50.8,30.16 50.8,28.26 51.75,27.3 68.26,27.3 69.22,28.26 69.22,41.59 68.58,42.23 SV4.6

## Text on the board
_tNames: C2 | C2 | L2 | L2 | C1 | R7 | L1 | C1 | R7 | L1 | Q1 | R2 | Q1 | R2 | IC1 | IC1 | C3 | C3 | C6 | R1 | C6 | R1 | JP1 | JP1 | C5 | C5 | C4 | C4 | R3 | R3 | SV1 | SV1 | LED1 | LED1 | C2 | C2 | L2 | L2 | C1 | R7 | C1 | R7 | L1 | L1 | Q1 | R2 | Q1 | R2 | IC1 | IC1 | C3 | C3 | C6 | R1 | C6 | R1 | JP1 | JP1 | C5 | C5 | C4 | R3 | C4 | R3 | SV1 | SV1 | LED1 | LED1
_bNames: C13 | C13 | C12 | C12 | C7 | R4 | C9 | C14 | C7 | R4 | C9 | C14 | U$2 | U$2 | R6 | R5 | C10 | R6 | R5 | C10 | U$1 | U$1 | C13 | C13 | C12 | C12 | C14 | C14 | C7 | R4 | C9 | U$2 | C7 | R4 | C9 | U$2 | R6 | R5 | R6 | R5 | C10 | C10 | U$1 | U$1